# Altium PCB NewXTX_2CPU.PcbDoc (part 1 of 2)
Units mm, origin at the board's own origin, x right, y up, seen from the top; angles counter-clockwise.
Board outline 290 x 98 mm, 2 copper layers (Top Layer, Bottom Layer); 222 components, 212 nets, 1642 pads, 0 vias.
Unrouted connection lines stored in the file: 376.
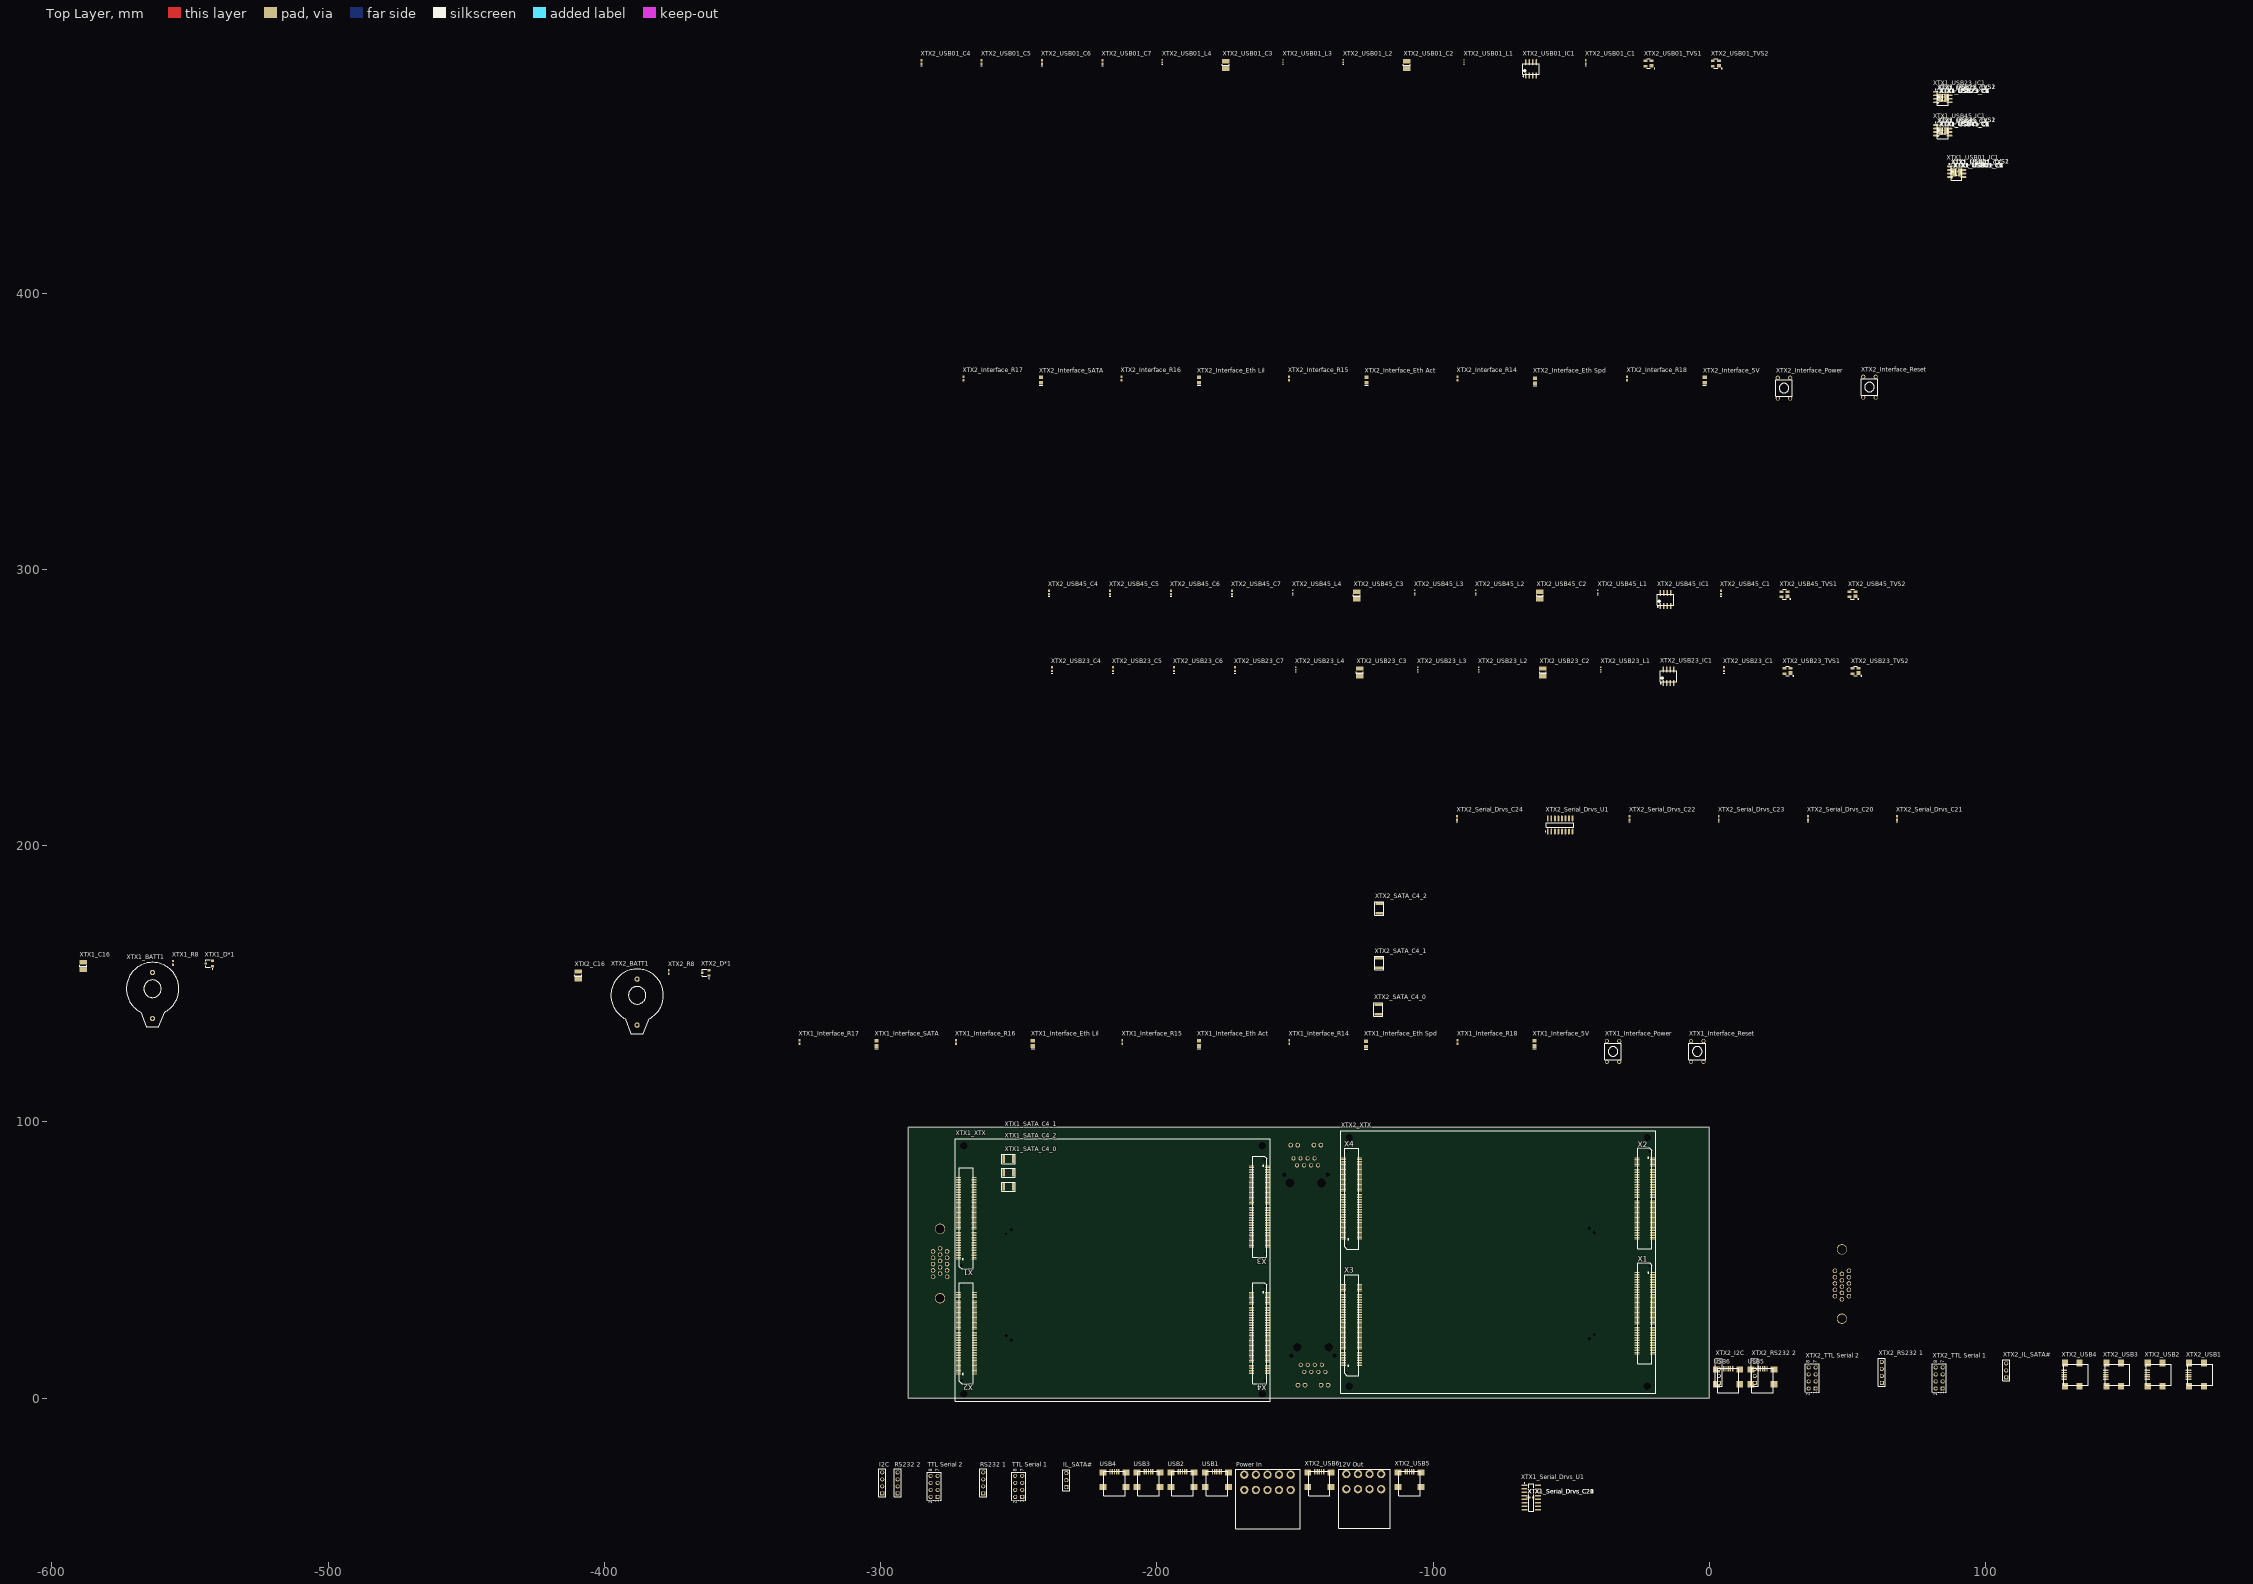
[diagram p0: Top Layer view]
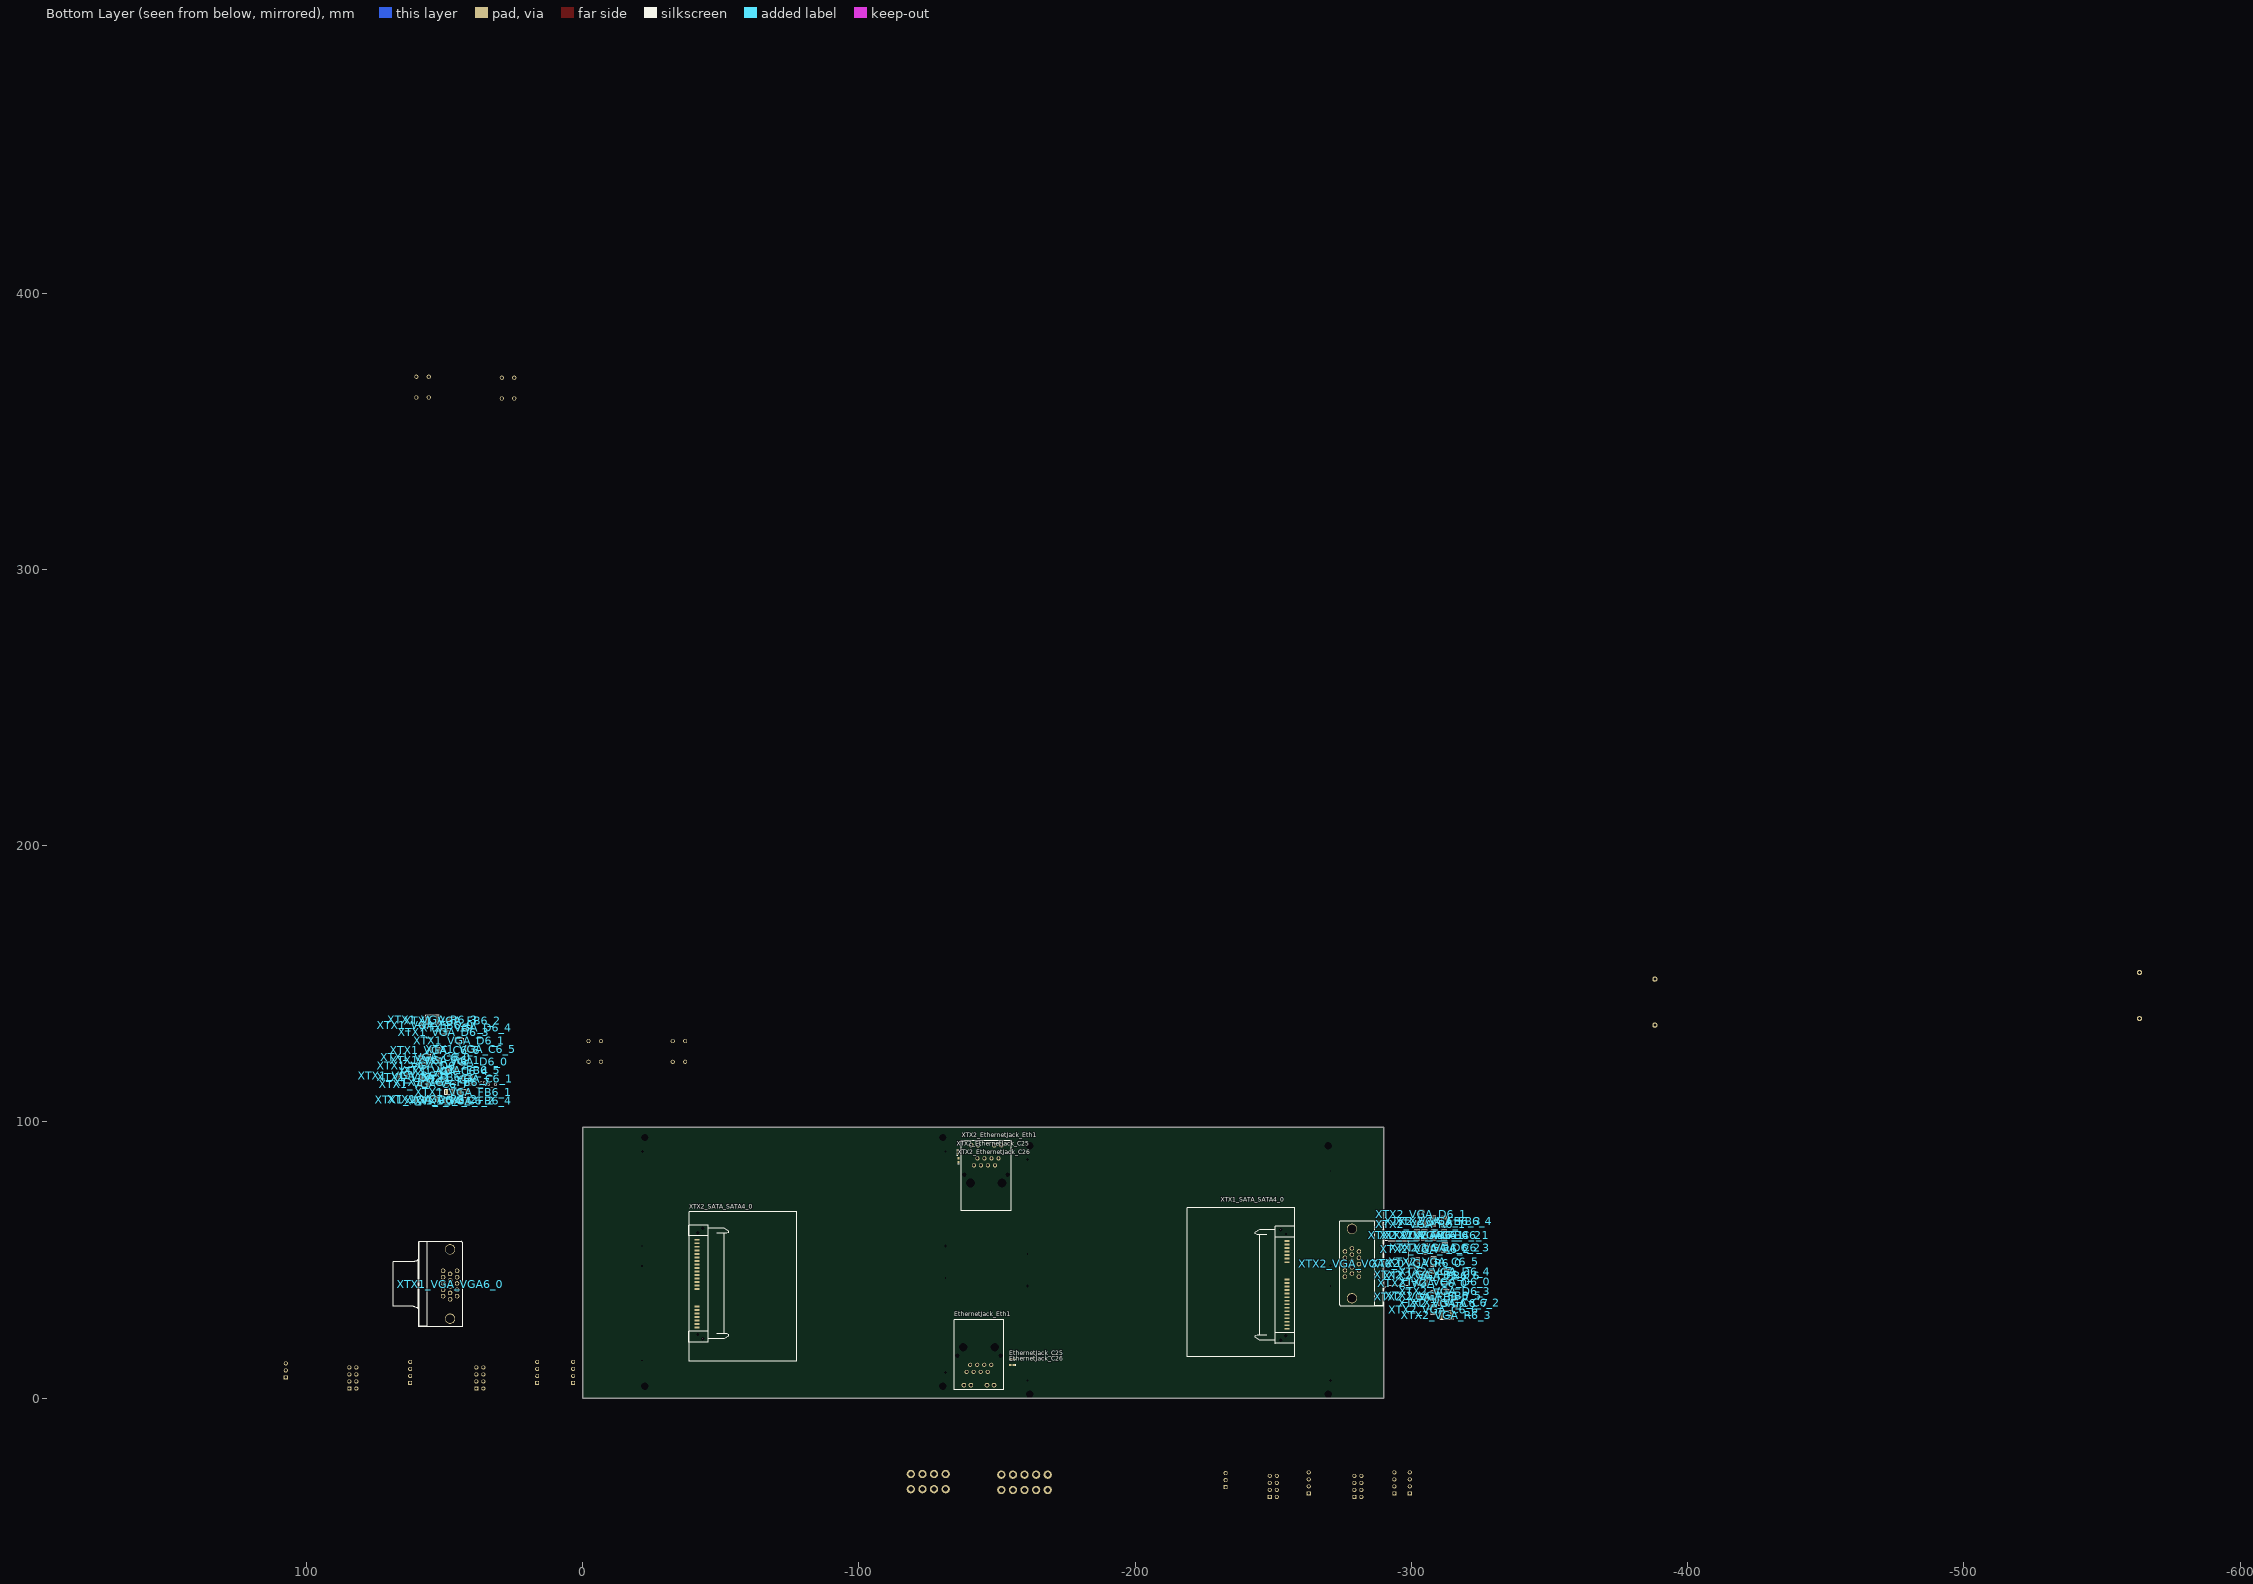
[diagram p1: Bottom Layer view, seen from below]

## Layer stack, top to bottom
Top Layer: signal copper 0.0356
Dielectric: dielectric 0.32, FR-4, Dk 4.8
Bottom Layer: signal copper 0.0356

## Board outline
0,0 0,98 -290,98 -290,0

## Design rules (kind name [scope] priority, off if disabled: settings)
Clearance [All] p1: gap=0.254
DiffPairsRouting "Schematic Differential Pairs Routing_29" [InNet('XTX2_USB5.D_P')] p1: maxlimit=2.54 minlimit=0.305 mostfreqgap=0.305 maxuncoupledlength=12.7
DiffPairsRouting "Schematic Differential Pairs Routing_27" [InNet('XTX2_USB5.D_N')] p2: maxlimit=2.54 minlimit=0.305 mostfreqgap=0.305 maxuncoupledlength=12.7
DiffPairsRouting "Schematic Differential Pairs Routing_25" [InNet('XTX2_USB4.D_P')] p3: maxlimit=2.54 minlimit=0.305 mostfreqgap=0.305 maxuncoupledlength=12.7
DiffPairsRouting "Schematic Differential Pairs Routing_31" [InNet('XTX2_USB4.D_N')] p4: maxlimit=2.54 minlimit=0.305 mostfreqgap=0.305 maxuncoupledlength=12.7
DiffPairsRouting "Schematic Differential Pairs Routing_24" [InNet('XTX2_USB3.D_P')] p5: maxlimit=2.54 minlimit=0.305 mostfreqgap=0.305 maxuncoupledlength=12.7
DiffPairsRouting "Schematic Differential Pairs Routing_30" [InNet('XTX2_USB3.D_N')] p6: maxlimit=2.54 minlimit=0.305 mostfreqgap=0.305 maxuncoupledlength=12.7
DiffPairsRouting "Schematic Differential Pairs Routing_28" [InNet('XTX2_USB2.D_P')] p7: maxlimit=2.54 minlimit=0.305 mostfreqgap=0.305 maxuncoupledlength=12.7
DiffPairsRouting "Schematic Differential Pairs Routing_26" [InNet('XTX2_USB2.D_N')] p8: maxlimit=2.54 minlimit=0.305 mostfreqgap=0.305 maxuncoupledlength=12.7
DiffPairsRouting "Schematic Differential Pairs Routing_17" [InNet('XTX2_USB1.D_P')] p9: maxlimit=2.54 minlimit=0.305 mostfreqgap=0.305 maxuncoupledlength=12.7
DiffPairsRouting "Schematic Differential Pairs Routing_23" [InNet('XTX2_USB1.D_N')] p10: maxlimit=2.54 minlimit=0.305 mostfreqgap=0.305 maxuncoupledlength=12.7
DiffPairsRouting "Schematic Differential Pairs Routing_21" [InNet('XTX2_USB0.D_P')] p11: maxlimit=2.54 minlimit=0.305 mostfreqgap=0.305 maxuncoupledlength=12.7
DiffPairsRouting "Schematic Differential Pairs Routing_20" [InNet('XTX2_USB0.D_N')] p12: maxlimit=2.54 minlimit=0.305 mostfreqgap=0.305 maxuncoupledlength=12.7
DiffPairsRouting "Schematic Differential Pairs Routing_19" [InNet('XTX1_USB5.D_P')] p13: maxlimit=2.54 minlimit=0.305 mostfreqgap=0.305 maxuncoupledlength=12.7
DiffPairsRouting "Schematic Differential Pairs Routing_18" [InNet('XTX1_USB5.D_N')] p14: maxlimit=2.54 minlimit=0.305 mostfreqgap=0.305 maxuncoupledlength=12.7
DiffPairsRouting "Schematic Differential Pairs Routing_11" [InNet('XTX1_USB4.D_P')] p15: maxlimit=2.54 minlimit=0.305 mostfreqgap=0.305 maxuncoupledlength=12.7
DiffPairsRouting "Schematic Differential Pairs Routing_22" [InNet('XTX1_USB4.D_N')] p16: maxlimit=2.54 minlimit=0.305 mostfreqgap=0.305 maxuncoupledlength=12.7
DiffPairsRouting "Schematic Differential Pairs Routing_9" [InNet('XTX1_USB3.D_P')] p17: maxlimit=2.54 minlimit=0.305 mostfreqgap=0.305 maxuncoupledlength=12.7
DiffPairsRouting "Schematic Differential Pairs Routing_16" [InNet('XTX1_USB3.D_N')] p18: maxlimit=2.54 minlimit=0.305 mostfreqgap=0.305 maxuncoupledlength=12.7
DiffPairsRouting "Schematic Differential Pairs Routing_15" [InNet('XTX1_USB2.D_P')] p19: maxlimit=2.54 minlimit=0.305 mostfreqgap=0.305 maxuncoupledlength=12.7
DiffPairsRouting "Schematic Differential Pairs Routing_14" [InNet('XTX1_USB2.D_N')] p20: maxlimit=2.54 minlimit=0.305 mostfreqgap=0.305 maxuncoupledlength=12.7
DiffPairsRouting "Schematic Differential Pairs Routing_8" [InNet('XTX1_USB1.D_P')] p21: maxlimit=2.54 minlimit=0.305 mostfreqgap=0.305 maxuncoupledlength=12.7
DiffPairsRouting "Schematic Differential Pairs Routing_10" [InNet('XTX1_USB1.D_N')] p22: maxlimit=2.54 minlimit=0.305 mostfreqgap=0.305 maxuncoupledlength=12.7
DiffPairsRouting "Schematic Differential Pairs Routing_13" [InNet('XTX1_USB0.D_P')] p23: maxlimit=2.54 minlimit=0.305 mostfreqgap=0.305 maxuncoupledlength=12.7
DiffPairsRouting "Schematic Differential Pairs Routing_12" [InNet('XTX1_USB0.D_N')] p24: maxlimit=2.54 minlimit=0.305 mostfreqgap=0.305 maxuncoupledlength=12.7
DiffPairsRouting "Schematic Differential Pairs Routing" [InNet('XTX1_SATA0_RX_N')] p25: maxlimit=0.178 minlimit=0.178 mostfreqgap=0.178 maxuncoupledlength=12.7
DiffPairsRouting "Schematic Differential Pairs Routing_4" [InNet('XTX2_SATA0_RX_N')] p26: maxlimit=0.178 minlimit=0.178 mostfreqgap=0.178 maxuncoupledlength=12.7
DiffPairsRouting "Schematic Differential Pairs Routing_1" [InNet('XTX1_SATA0_RX_P')] p27: maxlimit=0.178 minlimit=0.178 mostfreqgap=0.178 maxuncoupledlength=12.7
DiffPairsRouting "Schematic Differential Pairs Routing_5" [InNet('XTX2_SATA0_RX_P')] p28: maxlimit=0.178 minlimit=0.178 mostfreqgap=0.178 maxuncoupledlength=12.7
DiffPairsRouting "Schematic Differential Pairs Routing_2" [InNet('XTX1_SATA0_TX_N')] p29: maxlimit=0.178 minlimit=0.178 mostfreqgap=0.178 maxuncoupledlength=12.7
DiffPairsRouting "Schematic Differential Pairs Routing_6" [InNet('XTX2_SATA0_TX_N')] p30: maxlimit=0.178 minlimit=0.178 mostfreqgap=0.178 maxuncoupledlength=12.7
DiffPairsRouting "Schematic Differential Pairs Routing_3" [InNet('XTX1_SATA0_TX_P')] p31: maxlimit=0.178 minlimit=0.178 mostfreqgap=0.178 maxuncoupledlength=12.7
DiffPairsRouting "Schematic Differential Pairs Routing_7" [InNet('XTX2_SATA0_TX_P')] p32: maxlimit=0.178 minlimit=0.178 mostfreqgap=0.178 maxuncoupledlength=12.7
DiffPairsRouting [All] p33: maxlimit=0.254 minlimit=0.254 mostfreqgap=0.254 maxuncoupledlength=12.7
Length "Schematic Length Constraint" [InNet('XTX1_SATA0_RX_N')] p1: maxlimit=114.3 minlimit=0
Length "Schematic Length Constraint_4" [InNet('XTX2_SATA0_RX_N')] p2: maxlimit=114.3 minlimit=0
Length "Schematic Length Constraint_1" [InNet('XTX1_SATA0_RX_P')] p3: maxlimit=114.3 minlimit=0
Length "Schematic Length Constraint_5" [InNet('XTX2_SATA0_RX_P')] p4: maxlimit=114.3 minlimit=0
Length "Schematic Length Constraint_2" [InNet('XTX1_SATA0_TX_N')] p5: maxlimit=114.3 minlimit=0
Length "Schematic Length Constraint_6" [InNet('XTX2_SATA0_TX_N')] p6: maxlimit=114.3 minlimit=0
Length "Schematic Length Constraint_3" [InNet('XTX1_SATA0_TX_P')] p7: maxlimit=114.3 minlimit=0
Length "Schematic Length Constraint_7" [InNet('XTX2_SATA0_TX_P')] p8: maxlimit=114.3 minlimit=0
MatchedLengths "Schematic Matched Net Lengths_28" [InNet('XTX2_USB5.D_P')] p1: tolerance=2.54 checknetsindiffpair=TRUE checkdiffpairvsdiffpair=FALSE checkothers=FALSE
MatchedLengths "Schematic Matched Net Lengths_26" [InNet('XTX2_USB5.D_N')] p2: tolerance=2.54 checknetsindiffpair=TRUE checkdiffpairvsdiffpair=FALSE checkothers=FALSE
MatchedLengths "Schematic Matched Net Lengths_31" [InNet('XTX2_USB4.D_P')] p3: tolerance=2.54 checknetsindiffpair=TRUE checkdiffpairvsdiffpair=FALSE checkothers=FALSE
MatchedLengths "Schematic Matched Net Lengths_30" [InNet('XTX2_USB4.D_N')] p4: tolerance=2.54 checknetsindiffpair=TRUE checkdiffpairvsdiffpair=FALSE checkothers=FALSE
MatchedLengths "Schematic Matched Net Lengths_24" [InNet('XTX2_USB3.D_P')] p5: tolerance=2.54 checknetsindiffpair=TRUE checkdiffpairvsdiffpair=FALSE checkothers=FALSE
MatchedLengths "Schematic Matched Net Lengths_29" [InNet('XTX2_USB3.D_N')] p6: tolerance=2.54 checknetsindiffpair=TRUE checkdiffpairvsdiffpair=FALSE checkothers=FALSE
MatchedLengths "Schematic Matched Net Lengths_27" [InNet('XTX2_USB2.D_P')] p7: tolerance=2.54 checknetsindiffpair=TRUE checkdiffpairvsdiffpair=FALSE checkothers=FALSE
MatchedLengths "Schematic Matched Net Lengths_25" [InNet('XTX2_USB2.D_N')] p8: tolerance=2.54 checknetsindiffpair=TRUE checkdiffpairvsdiffpair=FALSE checkothers=FALSE
MatchedLengths "Schematic Matched Net Lengths_23" [InNet('XTX2_USB1.D_P')] p9: tolerance=2.54 checknetsindiffpair=TRUE checkdiffpairvsdiffpair=FALSE checkothers=FALSE
MatchedLengths "Schematic Matched Net Lengths_22" [InNet('XTX2_USB1.D_N')] p10: tolerance=2.54 checknetsindiffpair=TRUE checkdiffpairvsdiffpair=FALSE checkothers=FALSE
MatchedLengths "Schematic Matched Net Lengths_20" [InNet('XTX2_USB0.D_P')] p11: tolerance=2.54 checknetsindiffpair=TRUE checkdiffpairvsdiffpair=FALSE checkothers=FALSE
MatchedLengths "Schematic Matched Net Lengths_19" [InNet('XTX2_USB0.D_N')] p12: tolerance=2.54 checknetsindiffpair=TRUE checkdiffpairvsdiffpair=FALSE checkothers=FALSE
MatchedLengths "Schematic Matched Net Lengths_18" [InNet('XTX1_USB5.D_P')] p13: tolerance=2.54 checknetsindiffpair=TRUE checkdiffpairvsdiffpair=FALSE checkothers=FALSE
MatchedLengths "Schematic Matched Net Lengths_17" [InNet('XTX1_USB5.D_N')] p14: tolerance=2.54 checknetsindiffpair=TRUE checkdiffpairvsdiffpair=FALSE checkothers=FALSE
MatchedLengths "Schematic Matched Net Lengths_16" [InNet('XTX1_USB4.D_P')] p15: tolerance=2.54 checknetsindiffpair=TRUE checkdiffpairvsdiffpair=FALSE checkothers=FALSE
MatchedLengths "Schematic Matched Net Lengths_21" [InNet('XTX1_USB4.D_N')] p16: tolerance=2.54 checknetsindiffpair=TRUE checkdiffpairvsdiffpair=FALSE checkothers=FALSE
MatchedLengths "Schematic Matched Net Lengths_10" [InNet('XTX1_USB3.D_P')] p17: tolerance=2.54 checknetsindiffpair=TRUE checkdiffpairvsdiffpair=FALSE checkothers=FALSE
MatchedLengths "Schematic Matched Net Lengths_15" [InNet('XTX1_USB3.D_N')] p18: tolerance=2.54 checknetsindiffpair=TRUE checkdiffpairvsdiffpair=FALSE checkothers=FALSE
MatchedLengths "Schematic Matched Net Lengths_14" [InNet('XTX1_USB2.D_P')] p19: tolerance=2.54 checknetsindiffpair=TRUE checkdiffpairvsdiffpair=FALSE checkothers=FALSE
MatchedLengths "Schematic Matched Net Lengths_13" [InNet('XTX1_USB2.D_N')] p20: tolerance=2.54 checknetsindiffpair=TRUE checkdiffpairvsdiffpair=FALSE checkothers=FALSE
MatchedLengths "Schematic Matched Net Lengths_8" [InNet('XTX1_USB1.D_P')] p21: tolerance=2.54 checknetsindiffpair=TRUE checkdiffpairvsdiffpair=FALSE checkothers=FALSE
MatchedLengths "Schematic Matched Net Lengths_9" [InNet('XTX1_USB1.D_N')] p22: tolerance=2.54 checknetsindiffpair=TRUE checkdiffpairvsdiffpair=FALSE checkothers=FALSE
MatchedLengths "Schematic Matched Net Lengths_12" [InNet('XTX1_USB0.D_P')] p23: tolerance=2.54 checknetsindiffpair=TRUE checkdiffpairvsdiffpair=FALSE checkothers=FALSE
MatchedLengths "Schematic Matched Net Lengths_11" [InNet('XTX1_USB0.D_N')] p24: tolerance=2.54 checknetsindiffpair=TRUE checkdiffpairvsdiffpair=FALSE checkothers=FALSE
MatchedLengths "Schematic Matched Net Lengths" [InNet('XTX1_SATA0_RX_N')] p25: tolerance=0.127 checknetsindiffpair=TRUE checkdiffpairvsdiffpair=FALSE checkothers=FALSE
MatchedLengths "Schematic Matched Net Lengths_4" [InNet('XTX2_SATA0_RX_N')] p26: tolerance=0.127 checknetsindiffpair=TRUE checkdiffpairvsdiffpair=FALSE checkothers=FALSE
MatchedLengths "Schematic Matched Net Lengths_1" [InNet('XTX1_SATA0_RX_P')] p27: tolerance=0.127 checknetsindiffpair=TRUE checkdiffpairvsdiffpair=FALSE checkothers=FALSE
MatchedLengths "Schematic Matched Net Lengths_5" [InNet('XTX2_SATA0_RX_P')] p28: tolerance=0.127 checknetsindiffpair=TRUE checkdiffpairvsdiffpair=FALSE checkothers=FALSE
MatchedLengths "Schematic Matched Net Lengths_2" [InNet('XTX1_SATA0_TX_N')] p29: tolerance=0.127 checknetsindiffpair=TRUE checkdiffpairvsdiffpair=FALSE checkothers=FALSE
MatchedLengths "Schematic Matched Net Lengths_6" [InNet('XTX2_SATA0_TX_N')] p30: tolerance=0.127 checknetsindiffpair=TRUE checkdiffpairvsdiffpair=FALSE checkothers=FALSE
MatchedLengths "Schematic Matched Net Lengths_3" [InNet('XTX1_SATA0_TX_P')] p31: tolerance=0.127 checknetsindiffpair=TRUE checkdiffpairvsdiffpair=FALSE checkothers=FALSE
MatchedLengths "Schematic Matched Net Lengths_7" [InNet('XTX2_SATA0_TX_P')] p32: tolerance=0.127 checknetsindiffpair=TRUE checkdiffpairvsdiffpair=FALSE checkothers=FALSE
PolygonConnect [All] p1: connectstyle=Relief reliefconductorwidth=0.254 reliefentries=4 polygonreliefangle="90 Angle"
RoomDefinition XTX2_USB45 [InComponentClass('XTX2_USB45')] p1: confinementstyle=ConfineIn formatcopy=TRUE lockcomponents=FALSE outline -444.5,-129.54 -393.7,-129.54 -393.7,-104.14 -444.5,-104.14
RoomDefinition XTX2_USB23 [InComponentClass('XTX2_USB23')] p2: confinementstyle=ConfineIn formatcopy=TRUE lockcomponents=FALSE outline -444.5,-129.54 -393.7,-129.54 -393.7,-104.14 -444.5,-104.14
RoomDefinition XTX2_USB01 [InComponentClass('XTX2_USB01')] p3: confinementstyle=ConfineIn formatcopy=TRUE lockcomponents=FALSE outline -444.5,-129.54 -393.7,-129.54 -393.7,-104.14 -444.5,-104.14
RoomDefinition XTX2_Serial_Drvs [InComponentClass('XTX2_Serial_Drvs')] p4: confinementstyle=ConfineIn formatcopy=TRUE lockcomponents=FALSE outline -444.5,-129.54 -393.7,-129.54 -393.7,-104.14 -444.5,-104.14
RoomDefinition XTX2_SATA [InComponentClass('XTX2_SATA')] p5: confinementstyle=ConfineIn formatcopy=TRUE lockcomponents=FALSE outline -444.5,-129.54 -393.7,-129.54 -393.7,-104.14 -444.5,-104.14
RoomDefinition XTX2_EthernetJack [InComponentClass('XTX2_EthernetJack')] p6: confinementstyle=ConfineIn formatcopy=TRUE lockcomponents=FALSE outline -444.5,-129.54 -393.7,-129.54 -393.7,-104.14 -444.5,-104.14
RoomDefinition XTX1_USB45 [InComponentClass('XTX1_USB45')] p7: confinementstyle=ConfineIn formatcopy=TRUE lockcomponents=FALSE outline -444.5,-129.54 -393.7,-129.54 -393.7,-104.14 -444.5,-104.14
RoomDefinition XTX1_USB23 [InComponentClass('XTX1_USB23')] p8: confinementstyle=ConfineIn formatcopy=TRUE lockcomponents=FALSE outline -444.5,-129.54 -393.7,-129.54 -393.7,-104.14 -444.5,-104.14
RoomDefinition XTX1_USB01 [InComponentClass('XTX1_USB01')] p9: confinementstyle=ConfineIn formatcopy=TRUE lockcomponents=FALSE outline -444.5,-129.54 -393.7,-129.54 -393.7,-104.14 -444.5,-104.14
RoomDefinition XTX1_Serial_Drvs [InComponentClass('XTX1_Serial_Drvs')] p10: confinementstyle=ConfineIn formatcopy=TRUE lockcomponents=FALSE outline -444.5,-129.54 -393.7,-129.54 -393.7,-104.14 -444.5,-104.14
RoomDefinition XTX1_SATA [InComponentClass('XTX1_SATA')] p11: confinementstyle=ConfineIn formatcopy=TRUE lockcomponents=FALSE outline -444.5,-129.54 -393.7,-129.54 -393.7,-104.14 -444.5,-104.14
RoomDefinition EthernetJack [InComponentClass('EthernetJack')] p12: confinementstyle=ConfineIn formatcopy=TRUE lockcomponents=FALSE outline -444.5,-129.54 -393.7,-129.54 -393.7,-104.14 -444.5,-104.14
RoomDefinition XTX2_VGA [InComponentClass('XTX2_VGA')] p13: confinementstyle=ConfineIn formatcopy=TRUE lockcomponents=FALSE outline -320,27 -271,27 -271,70 -320,70
RoomDefinition XTX1_VGA [InComponentClass('XTX1_VGA')] p14: confinementstyle=ConfineIn formatcopy=TRUE lockcomponents=FALSE outline 32.5,16 79,16 79,65 32.5,65
RoomDefinition XTX1_Interface [InComponentClass('XTX1_Interface')] p15: confinementstyle=ConfineIn formatcopy=TRUE lockcomponents=FALSE outline -329.977,120.658 21.686,120.658 21.686,133.104 -329.977,133.104
RoomDefinition XTX1 [InComponentClass('XTX1')] p16: confinementstyle=ConfineIn formatcopy=TRUE lockcomponents=FALSE outline -297,-6 10,-6 10,114 -297,114
RoomDefinition XTX2_Interface [InComponentClass('XTX2_Interface')] p17: confinementstyle=ConfineIn formatcopy=TRUE lockcomponents=FALSE outline -270.637,360.807 84.074,360.807 84.074,373.253 -270.637,373.253
RoomDefinition XTX2 [InComponentClass('XTX2')] p18: confinementstyle=ConfineIn formatcopy=TRUE lockcomponents=FALSE outline -297,-7 10,-7 10,114 -297,114
RoomDefinition XTXBoard2 [InComponentClass('XTXBoard2')] p19: confinementstyle=ConfineIn formatcopy=TRUE lockcomponents=FALSE outline -300.924,-47.606 -102.804,-47.606 -102.804,-22.841 -300.924,-22.841
RoutingVias [All] p1: holewidth=0.711 width=1.27 viastyle="Through Hole" minholewidth=0.711 minwidth=1.27 maxholewidth=0.711 maxwidth=1.27
SilkscreenOverComponentPads [All] p1: minsilkscreentomaskgap=0.254
SolderMaskExpansion [All] p1: expansion=0.102
TestPointUsage [All] p1: valid=0 allowmultiple=FALSE
Testpoint [All] p1: side=15 testpointundercomponent=TRUE minsize=1.016 maxsize=2.54 preferedsize=1.524 minholesize=0 maxholesize=1.016 preferedholesize=0.813 testpointgrid=0.025 style=1023 order=0123456789
Width "Schematic Width Constraint_28" [InNet('XTX2_USB5.D_P')] p1: maxlimit=0.152 minlimit=0.152 preferedwidth=0.152
Width "Schematic Width Constraint_26" [InNet('XTX2_USB5.D_N')] p2: maxlimit=0.152 minlimit=0.152 preferedwidth=0.152
Width "Schematic Width Constraint_31" [InNet('XTX2_USB4.D_P')] p3: maxlimit=0.152 minlimit=0.152 preferedwidth=0.152
Width "Schematic Width Constraint_30" [InNet('XTX2_USB4.D_N')] p4: maxlimit=0.152 minlimit=0.152 preferedwidth=0.152
Width "Schematic Width Constraint_24" [InNet('XTX2_USB3.D_P')] p5: maxlimit=0.152 minlimit=0.152 preferedwidth=0.152
Width "Schematic Width Constraint_29" [InNet('XTX2_USB3.D_N')] p6: maxlimit=0.152 minlimit=0.152 preferedwidth=0.152
Width "Schematic Width Constraint_27" [InNet('XTX2_USB2.D_P')] p7: maxlimit=0.152 minlimit=0.152 preferedwidth=0.152
Width "Schematic Width Constraint_25" [InNet('XTX2_USB2.D_N')] p8: maxlimit=0.152 minlimit=0.152 preferedwidth=0.152
Width "Schematic Width Constraint_23" [InNet('XTX2_USB1.D_P')] p9: maxlimit=0.152 minlimit=0.152 preferedwidth=0.152
Width "Schematic Width Constraint_22" [InNet('XTX2_USB1.D_N')] p10: maxlimit=0.152 minlimit=0.152 preferedwidth=0.152
Width "Schematic Width Constraint_20" [InNet('XTX2_USB0.D_P')] p11: maxlimit=0.152 minlimit=0.152 preferedwidth=0.152
Width "Schematic Width Constraint_19" [InNet('XTX2_USB0.D_N')] p12: maxlimit=0.152 minlimit=0.152 preferedwidth=0.152
Width "Schematic Width Constraint_10" [InNet('XTX1_USB5.D_P')] p13: maxlimit=0.152 minlimit=0.152 preferedwidth=0.152
Width "Schematic Width Constraint_9" [InNet('XTX1_USB5.D_N')] p14: maxlimit=0.152 minlimit=0.152 preferedwidth=0.152
Width "Schematic Width Constraint_8" [InNet('XTX1_USB4.D_P')] p15: maxlimit=0.152 minlimit=0.152 preferedwidth=0.152
Width "Schematic Width Constraint_21" [InNet('XTX1_USB4.D_N')] p16: maxlimit=0.152 minlimit=0.152 preferedwidth=0.152
Width "Schematic Width Constraint_2" [InNet('XTX1_USB3.D_P')] p17: maxlimit=0.152 minlimit=0.152 preferedwidth=0.152
Width "Schematic Width Constraint_7" [InNet('XTX1_USB3.D_N')] p18: maxlimit=0.152 minlimit=0.152 preferedwidth=0.152
Width "Schematic Width Constraint_6" [InNet('XTX1_USB2.D_P')] p19: maxlimit=0.152 minlimit=0.152 preferedwidth=0.152
Width "Schematic Width Constraint_5" [InNet('XTX1_USB2.D_N')] p20: maxlimit=0.152 minlimit=0.152 preferedwidth=0.152
Width "Schematic Width Constraint" [InNet('XTX1_USB1.D_P')] p21: maxlimit=0.152 minlimit=0.152 preferedwidth=0.152
Width "Schematic Width Constraint_1" [InNet('XTX1_USB1.D_N')] p22: maxlimit=0.152 minlimit=0.152 preferedwidth=0.152
Width "Schematic Width Constraint_4" [InNet('XTX1_USB0.D_P')] p23: maxlimit=0.152 minlimit=0.152 preferedwidth=0.152
Width "Schematic Width Constraint_3" [InNet('XTX1_USB0.D_N')] p24: maxlimit=0.152 minlimit=0.152 preferedwidth=0.152
Width "Schematic Width Constraint_11" [InNet('XTX1_SATA0_RX_N')] p25: maxlimit=0.152 minlimit=0.152 preferedwidth=0.152
Width "Schematic Width Constraint_15" [InNet('XTX2_SATA0_RX_N')] p26: maxlimit=0.152 minlimit=0.152 preferedwidth=0.152
Width "Schematic Width Constraint_12" [InNet('XTX1_SATA0_RX_P')] p27: maxlimit=0.152 minlimit=0.152 preferedwidth=0.152
Width "Schematic Width Constraint_16" [InNet('XTX2_SATA0_RX_P')] p28: maxlimit=0.152 minlimit=0.152 preferedwidth=0.152
Width "Schematic Width Constraint_13" [InNet('XTX1_SATA0_TX_N')] p29: maxlimit=0.152 minlimit=0.152 preferedwidth=0.152
Width "Schematic Width Constraint_17" [InNet('XTX2_SATA0_TX_N')] p30: maxlimit=0.152 minlimit=0.152 preferedwidth=0.152
Width "Schematic Width Constraint_14" [InNet('XTX1_SATA0_TX_P')] p31: maxlimit=0.152 minlimit=0.152 preferedwidth=0.152
Width "Schematic Width Constraint_18" [InNet('XTX2_SATA0_TX_P')] p32: maxlimit=0.152 minlimit=0.152 preferedwidth=0.152
Width "Schematic Width Constraint_33" [InNet('12VCC')] p33: maxlimit=2.54 minlimit=0.635 preferedwidth=0.635
Width "Schematic Width Constraint_32" [InNet('12VCC')] p34: maxlimit=2.54 minlimit=0.635 preferedwidth=0.635
Width [All] p35: maxlimit=0.254 minlimit=0.254 preferedwidth=0.254
22 further rules are at their usual default settings.

## Classes and differential pairs
channel class XTX: XTX1 XTX2
channel class VGA: XTX1_VGA XTX2_VGA
channel class USB: XTX1_USB01 XTX1_USB23 XTX1_USB45 XTX2_USB01 XTX2_USB23 XTX2_USB45
channel class SerialLvlConvert: XTX1_Serial_Drvs XTX2_Serial_Drvs
channel class SATA: XTX1_SATA XTX2_SATA
channel class LEDSandButtons: XTX1_Interface XTX2_Interface
channel class EthernetMagJack: EthernetJack XTX2_EthernetJack
component class XTXBoard2: "12V Out" I2C IL_SATA# "Power In" "RS232 1" "RS232 2" "TTL Serial 1" "TTL Serial 2" USB1 USB2 USB3 USB4 USB5 USB6 XTX2_I2C XTX2_IL_SATA# "XTX2_RS232 1" "XTX2_RS232 2" "XTX2_TTL Serial 1" "XTX2_TTL Serial 2" XTX2_USB1 XTX2_USB2 XTX2_USB3 XTX2_USB4 XTX2_USB5 XTX2_USB6
component class XTX2: XTX2_BATT1 XTX2_C16 XTX2_D*1 XTX2_R8 XTX2_XTX
component class XTX2_Interface: XTX2_Interface_5V "XTX2_Interface_Eth Act" "XTX2_Interface_Eth Lil" "XTX2_Interface_Eth Spd" XTX2_Interface_Power XTX2_Interface_R14 XTX2_Interface_R15 XTX2_Interface_R16 XTX2_Interface_R17 XTX2_Interface_R18 XTX2_Interface_Reset XTX2_Interface_SATA
component class XTX1: XTX1_BATT1 XTX1_C16 XTX1_D*1 XTX1_R8 XTX1_XTX
component class XTX1_Interface: XTX1_Interface_5V "XTX1_Interface_Eth Act" "XTX1_Interface_Eth Lil" "XTX1_Interface_Eth Spd" XTX1_Interface_Power XTX1_Interface_R14 XTX1_Interface_R15 XTX1_Interface_R16 XTX1_Interface_R17 XTX1_Interface_R18 XTX1_Interface_Reset XTX1_Interface_SATA
component class XTX2_VGA: XTX2_VGA_C6_0 XTX2_VGA_C6_1 XTX2_VGA_C6_2 XTX2_VGA_C6_3 XTX2_VGA_C6_4 XTX2_VGA_C6_5 XTX2_VGA_C6_6 XTX2_VGA_C6_7 XTX2_VGA_D6_0 XTX2_VGA_D6_1 XTX2_VGA_D6_2 XTX2_VGA_D6_3 XTX2_VGA_D6_4 XTX2_VGA_FB6_0 XTX2_VGA_FB6_1 XTX2_VGA_FB6_2 XTX2_VGA_FB6_3 XTX2_VGA_FB6_4 XTX2_VGA_FB6_5 XTX2_VGA_FB6_6 XTX2_VGA_FB6_7 XTX2_VGA_R6_0 XTX2_VGA_R6_1 XTX2_VGA_R6_2 XTX2_VGA_R6_3 XTX2_VGA_VGA6_0
component class XTX2_EthernetJack: XTX2_EthernetJack_C25 XTX2_EthernetJack_C26 XTX2_EthernetJack_Eth1
component class EthernetJack: EthernetJack_C25 EthernetJack_C26 EthernetJack_Eth1
component class XTX2_SATA: XTX2_SATA_C4_0 XTX2_SATA_C4_1 XTX2_SATA_C4_2 XTX2_SATA_SATA4_0
component class XTX1_SATA: XTX1_SATA_C4_0 XTX1_SATA_C4_1 XTX1_SATA_C4_2 XTX1_SATA_SATA4_0
component class XTX2_Serial_Drvs: XTX2_Serial_Drvs_C20 XTX2_Serial_Drvs_C21 XTX2_Serial_Drvs_C22 XTX2_Serial_Drvs_C23 XTX2_Serial_Drvs_C24 XTX2_Serial_Drvs_U1
component class XTX1_Serial_Drvs: XTX1_Serial_Drvs_C20 XTX1_Serial_Drvs_C21 XTX1_Serial_Drvs_C22 XTX1_Serial_Drvs_C23 XTX1_Serial_Drvs_C24 XTX1_Serial_Drvs_U1
component class XTX2_USB01: XTX2_USB01_C1 XTX2_USB01_C2 XTX2_USB01_C3 XTX2_USB01_C4 XTX2_USB01_C5 XTX2_USB01_C6 XTX2_USB01_C7 XTX2_USB01_IC1 XTX2_USB01_L1 XTX2_USB01_L2 XTX2_USB01_L3 XTX2_USB01_L4 XTX2_USB01_TVS1 XTX2_USB01_TVS2
component class XTX1_USB01: XTX1_USB01_C1 XTX1_USB01_C2 XTX1_USB01_C3 XTX1_USB01_C4 XTX1_USB01_C5 XTX1_USB01_C6 XTX1_USB01_C7 XTX1_USB01_IC1 XTX1_USB01_L1 XTX1_USB01_L2 XTX1_USB01_L3 XTX1_USB01_L4 XTX1_USB01_TVS1 XTX1_USB01_TVS2
component class XTX2_USB23: XTX2_USB23_C1 XTX2_USB23_C2 XTX2_USB23_C3 XTX2_USB23_C4 XTX2_USB23_C5 XTX2_USB23_C6 XTX2_USB23_C7 XTX2_USB23_IC1 XTX2_USB23_L1 XTX2_USB23_L2 XTX2_USB23_L3 XTX2_USB23_L4 XTX2_USB23_TVS1 XTX2_USB23_TVS2
component class XTX1_USB23: XTX1_USB23_C1 XTX1_USB23_C2 XTX1_USB23_C3 XTX1_USB23_C4 XTX1_USB23_C5 XTX1_USB23_C6 XTX1_USB23_C7 XTX1_USB23_IC1 XTX1_USB23_L1 XTX1_USB23_L2 XTX1_USB23_L3 XTX1_USB23_L4 XTX1_USB23_TVS1 XTX1_USB23_TVS2
component class XTX2_USB45: XTX2_USB45_C1 XTX2_USB45_C2 XTX2_USB45_C3 XTX2_USB45_C4 XTX2_USB45_C5 XTX2_USB45_C6 XTX2_USB45_C7 XTX2_USB45_IC1 XTX2_USB45_L1 XTX2_USB45_L2 XTX2_USB45_L3 XTX2_USB45_L4 XTX2_USB45_TVS1 XTX2_USB45_TVS2
component class XTX1_USB45: XTX1_USB45_C1 XTX1_USB45_C2 XTX1_USB45_C3 XTX1_USB45_C4 XTX1_USB45_C5 XTX1_USB45_C6 XTX1_USB45_C7 XTX1_USB45_IC1 XTX1_USB45_L1 XTX1_USB45_L2 XTX1_USB45_L3 XTX1_USB45_L4 XTX1_USB45_TVS1 XTX1_USB45_TVS2
component class XTX1_VGA: XTX1_VGA_C6_0 XTX1_VGA_C6_1 XTX1_VGA_C6_2 XTX1_VGA_C6_3 XTX1_VGA_C6_4 XTX1_VGA_C6_5 XTX1_VGA_C6_6 XTX1_VGA_C6_7 XTX1_VGA_D6_0 XTX1_VGA_D6_1 XTX1_VGA_D6_2 XTX1_VGA_D6_3 XTX1_VGA_D6_4 XTX1_VGA_FB6_0 XTX1_VGA_FB6_1 XTX1_VGA_FB6_2 XTX1_VGA_FB6_3 XTX1_VGA_FB6_4 XTX1_VGA_FB6_5 XTX1_VGA_FB6_6 XTX1_VGA_FB6_7 XTX1_VGA_R6_0 XTX1_VGA_R6_1 XTX1_VGA_R6_2 XTX1_VGA_R6_3 XTX1_VGA_VGA6_0
differential pair XTX2_SATA0_TX: +XTX2_SATA0_TX_P -XTX2_SATA0_TX_N
differential pair XTX2_SATA0_RX: +XTX2_SATA0_RX_P -XTX2_SATA0_RX_N
differential pair XTX2_ETH_TXD: +XTX2_ETH_TXD_P -XTX2_ETH_TXD_N
differential pair XTX2_ETH_RXD: +XTX2_ETH_RXD_P -XTX2_ETH_RXD_N
differential pair XTX1_USB5.D: +XTX1_USB5.D_P -XTX1_USB5.D_N
differential pair XTX1_USB4.D: +XTX1_USB4.D_P -XTX1_USB4.D_N
differential pair XTX1_USB3.D: +XTX1_USB3.D_P -XTX1_USB3.D_N
differential pair XTX1_USB2.D: +XTX1_USB2.D_P -XTX1_USB2.D_N
differential pair XTX1_USB1.D: +XTX1_USB1.D_P -XTX1_USB1.D_N
differential pair XTX1_USB0.D: +XTX1_USB0.D_P -XTX1_USB0.D_N
differential pair XTX1_SATA0_TX: +XTX1_SATA0_TX_P -XTX1_SATA0_TX_N
differential pair XTX1_SATA0_RX: +XTX1_SATA0_RX_P -XTX1_SATA0_RX_N
differential pair XTX1_ETH_TXD: +XTX1_ETH_TXD_P -XTX1_ETH_TXD_N
differential pair XTX1_ETH_RXD: +XTX1_ETH_RXD_P -XTX1_ETH_RXD_N
differential pair XTX2_USB0.D: +XTX2_USB0.D_P -XTX2_USB0.D_N
differential pair XTX2_USB1.D: +XTX2_USB1.D_P -XTX2_USB1.D_N
differential pair XTX2_USB2.D: +XTX2_USB2.D_P -XTX2_USB2.D_N
differential pair XTX2_USB3.D: +XTX2_USB3.D_P -XTX2_USB3.D_N
differential pair XTX2_USB4.D: +XTX2_USB4.D_P -XTX2_USB4.D_N
differential pair XTX2_USB5.D: +XTX2_USB5.D_P -XTX2_USB5.D_N

## Components (designator, comment, footprint, x,y, rotation, side; value= is the part's Value field where it differs from the comment)
"12V Out" "5569 Mini-Fit Jr 8-Pos Right Angle" "8-POS 5569 Mini-Fit Jr 2" -131.379,-33.001 r0 top
EthernetJack_C25 "Cap Semi" 0402 -155.431,14.035 r0 bottom (schematic designator C25)
EthernetJack_C26 "Cap Semi" 0402 -155.431,12.035 r0 bottom (schematic designator C26)
EthernetJack_Eth1 "48025-0002" 48025-0002 -143.431,12.035 r0 bottom (schematic designator Eth1)
I2C "Header 4" HDR1X4 -299.4,-34.525 r90 top
IL_SATA# "Header 3" HDR1X3 -232.725,-32.239 r90 top
"Power In" "5569 Mini-Fit Jr 10-Pos Right Angle" "10-Pos 5569 Mini-Fit Jr 2" -168.336,-33.255 r0 top
"RS232 1" "Header 4" HDR1X4 -262.824,-34.525 r90 top
"RS232 2" "Header 4" HDR1X4 -293.812,-34.525 r90 top
"TTL Serial 1" "Header 4X2" HDR2X4 -248.727,-35.795 r90 top
"TTL Serial 2" "Header 4X2" HDR2X4 -279.334,-35.795 r90 top
USB1 "UX60-MB-5ST" UX60-MB-5ST -178.242,-25.635 r0 top
USB2 "UX60-MB-5ST" UX60-MB-5ST -190.688,-25.635 r0 top
USB3 "UX60-MB-5ST" UX60-MB-5ST -203.007,-25.635 r0 top
USB4 "UX60-MB-5ST" UX60-MB-5ST -215.326,-25.635 r0 top
USB5 "UX60-MB-5ST" UX60-MB-5ST 19.304,11.557 r0 top
USB6 "UX60-MB-5ST" UX60-MB-5ST 6.858,11.557 r0 top
XTX1_BATT1 "BH600" BH600 -563.547,148.178 r0 top (schematic designator BATT1)
XTX1_C16 "Cap Semi" C1210 -588.693,156.433 r90 top (schematic designator C16)
XTX1_D*1 "BAV99" SOT-23 -543.1,157.322 r90 top (schematic designator D*1)
XTX1_Interface_5V "LED2" C0805 -63.277,128.405 r90 top (schematic designator 5V)
"XTX1_Interface_Eth Act" "LED2" C0805 -184.689,128.405 r90 top (schematic designator "Eth Act")
"XTX1_Interface_Eth Lil" "LED2" C0805 -244.887,128.405 r90 top (schematic designator "Eth Lil")
"XTX1_Interface_Eth Spd" "LED2" C0805 -124.237,128.151 r90 top (schematic designator "Eth Spd")
XTX1_Interface_Power "FSM Switch" FSM4JH -34.829,125.484 r90 top (schematic designator Power)
XTX1_Interface_R14 "Res Semi" 1005[0402] -152.05,128.913 r90 top (schematic designator R14)
XTX1_Interface_R15 "Res Semi" 1005[0402] -212.502,128.913 r90 top (schematic designator R15)
XTX1_Interface_R16 "Res Semi" 1005[0402] -272.7,128.913 r90 top (schematic designator R16)
XTX1_Interface_R17 "Res Semi" 1005[0402] -329.342,128.913 r90 top (schematic designator R17)
XTX1_Interface_R18 "Res Semi" 1005[0402] -91.09,128.913 r90 top (schematic designator R18)
XTX1_Interface_Reset "FSM Switch" FSM4JH -4.349,125.484 r90 top (schematic designator Reset)
XTX1_Interface_SATA "LED2" C0805 -301.529,128.405 r90 top (schematic designator SATA)
XTX1_R8 "Res Semi" 1005[0402] -556.181,157.576 r90 top (schematic designator R8)
XTX1_SATA_C4_0 "10uF" "1210 (3225) Capacitor" -253.654,76.552 r180 top (schematic designator C4_0)
XTX1_SATA_C4_1 "10uF" "1210 (3225) Capacitor" -253.654,81.552 r180 top (schematic designator C4_1)
XTX1_SATA_C4_2 "10uF" "1210 (3225) Capacitor" -253.654,86.552 r180 top (schematic designator C4_2)
XTX1_SATA_SATA4_0 "SATA Drive" "SATA HDD" -238.272,68.976 r0 bottom (schematic designator SATA4_0)
XTX1_Serial_Drvs_C20 "Cap Semi" 0402 -64.431,-36.035 r0 top (schematic designator C20)
XTX1_Serial_Drvs_C21 "Cap Semi" 0402 -64.431,-36.035 r0 top (schematic designator C21)
XTX1_Serial_Drvs_C22 "Cap Semi" 0402 -64.431,-36.035 r0 top (schematic designator C22)
XTX1_Serial_Drvs_C23 "Cap Semi" 0402 -64.431,-36.035 r0 top (schematic designator C23)
XTX1_Serial_Drvs_C24 "Cap Semi" 0402 -64.431,-36.035 r0 top (schematic designator C24)
XTX1_Serial_Drvs_U1 "MAX232ACSE" NSO16_N -64.431,-36.035 r0 top (schematic designator U1)
XTX1_USB01_C1 "Cap Semi" 0402 89.569,443.965 r0 top (schematic designator C1)
XTX1_USB01_C2 "Cap Semi" C1210 89.569,443.965 r0 top (schematic designator C2)
XTX1_USB01_C3 "Cap Semi" C1210 89.569,443.965 r0 top (schematic designator C3)
XTX1_USB01_C4 "Cap Semi" 0402 89.569,443.965 r0 top (schematic designator C4)
XTX1_USB01_C5 "Cap Semi" 0402 89.569,443.965 r0 top (schematic designator C5)
XTX1_USB01_C6 "Cap Semi" 0402 89.569,443.965 r0 top (schematic designator C6)
XTX1_USB01_C7 "Cap Semi" 0402 89.569,443.965 r0 top (schematic designator C7)
XTX1_USB01_IC1 "Micrel MIC2026" "8-Pin SOIC" 89.569,443.965 r0 top (schematic designator IC1)
XTX1_USB01_L1 "Inductor" 0402-A 89.569,443.965 r0 top (schematic designator L1)
XTX1_USB01_L2 "Inductor" 0402-A 89.569,443.965 r0 top (schematic designator L2)
XTX1_USB01_L3 "Inductor" 0402-A 89.569,443.965 r0 top (schematic designator L3)
XTX1_USB01_L4 "Inductor" 0402-A 89.569,443.965 r0 top (schematic designator L4)
XTX1_USB01_TVS1 "SR05.TCT" SOT143 89.569,443.965 r0 top (schematic designator TVS1)
XTX1_USB01_TVS2 "SR05.TCT" SOT143 89.569,443.965 r0 top (schematic designator TVS2)
XTX1_USB23_C1 "Cap Semi" 0402 84.569,470.965 r0 top (schematic designator C1)
XTX1_USB23_C2 "Cap Semi" C1210 84.569,470.965 r0 top (schematic designator C2)
XTX1_USB23_C3 "Cap Semi" C1210 84.569,470.965 r0 top (schematic designator C3)
XTX1_USB23_C4 "Cap Semi" 0402 84.569,470.965 r0 top (schematic designator C4)
XTX1_USB23_C5 "Cap Semi" 0402 84.569,470.965 r0 top (schematic designator C5)
XTX1_USB23_C6 "Cap Semi" 0402 84.569,470.965 r0 top (schematic designator C6)
XTX1_USB23_C7 "Cap Semi" 0402 84.569,470.965 r0 top (schematic designator C7)
XTX1_USB23_IC1 "Micrel MIC2026" "8-Pin SOIC" 84.569,470.965 r0 top (schematic designator IC1)
XTX1_USB23_L1 "Inductor" 0402-A 84.569,470.965 r0 top (schematic designator L1)
XTX1_USB23_L2 "Inductor" 0402-A 84.569,470.965 r0 top (schematic designator L2)
XTX1_USB23_L3 "Inductor" 0402-A 84.569,470.965 r0 top (schematic designator L3)
XTX1_USB23_L4 "Inductor" 0402-A 84.569,470.965 r0 top (schematic designator L4)
XTX1_USB23_TVS1 "SR05.TCT" SOT143 84.569,470.965 r0 top (schematic designator TVS1)
XTX1_USB23_TVS2 "SR05.TCT" SOT143 84.569,470.965 r0 top (schematic designator TVS2)
XTX1_USB45_C1 "Cap Semi" 0402 84.569,458.965 r0 top (schematic designator C1)
XTX1_USB45_C2 "Cap Semi" C1210 84.569,458.965 r0 top (schematic designator C2)
XTX1_USB45_C3 "Cap Semi" C1210 84.569,458.965 r0 top (schematic designator C3)
XTX1_USB45_C4 "Cap Semi" 0402 84.569,458.965 r0 top (schematic designator C4)
XTX1_USB45_C5 "Cap Semi" 0402 84.569,458.965 r0 top (schematic designator C5)
XTX1_USB45_C6 "Cap Semi" 0402 84.569,458.965 r0 top (schematic designator C6)
XTX1_USB45_C7 "Cap Semi" 0402 84.569,458.965 r0 top (schematic designator C7)
XTX1_USB45_IC1 "Micrel MIC2026" "8-Pin SOIC" 84.569,458.965 r0 top (schematic designator IC1)
XTX1_USB45_L1 "Inductor" 0402-A 84.569,458.965 r0 top (schematic designator L1)
XTX1_USB45_L2 "Inductor" 0402-A 84.569,458.965 r0 top (schematic designator L2)
XTX1_USB45_L3 "Inductor" 0402-A 84.569,458.965 r0 top (schematic designator L3)
XTX1_USB45_L4 "Inductor" 0402-A 84.569,458.965 r0 top (schematic designator L4)
XTX1_USB45_TVS1 "SR05.TCT" SOT143 84.569,458.965 r0 top (schematic designator TVS1)
XTX1_USB45_TVS2 "SR05.TCT" SOT143 84.569,458.965 r0 top (schematic designator TVS2)
XTX1_VGA_C6_0 "3.3pF" "0805 (2012) Capacitor" 56.883,123.304 r180 bottom (schematic designator C6_0)
XTX1_VGA_C6_1 "3.3pF" "0805 (2012) Capacitor" 41.643,115.684 r180 bottom (schematic designator C6_1)
XTX1_VGA_C6_2 "3.3pF" "0805 (2012) Capacitor" 48.133,107.696 r180 bottom (schematic designator C6_2)
XTX1_VGA_C6_3 "3.3pF" "0805 (2012) Capacitor" 58.915,108.064 r180 bottom (schematic designator C6_3)
XTX1_VGA_C6_4 "3.3pF" "0805 (2012) Capacitor" 50.279,118.224 r180 bottom (schematic designator C6_4)
XTX1_VGA_C6_5 "3.3pF" "0805 (2012) Capacitor" 40.627,126.352 r180 bottom (schematic designator C6_5)
XTX1_VGA_C6_6 "10pF 50V" "0805 (2012) Capacitor" 53.327,125.844 r180 bottom (schematic designator C6_6)
XTX1_VGA_C6_7 "10pF 50V" "0805 (2012) Capacitor" 57.391,113.652 r180 bottom (schematic designator C6_7)
XTX1_VGA_D6_0 "SOT23" SOT23 43.675,121.78 r180 bottom (schematic designator D6_0)
XTX1_VGA_D6_1 "Dual Schottky Diode" SOT23 44.691,129.4 r180 bottom (schematic designator D6_1)
XTX1_VGA_D6_2 "Dual Schottky Diode" SOT23 57.899,120.256 r180 bottom (schematic designator D6_2)
XTX1_VGA_D6_3 "SOT23" SOT23 50.279,132.448 r180 bottom (schematic designator D6_3)
XTX1_VGA_D6_4 "Dual Schottky Diode" SOT23 42.103,134.128 r180 bottom (schematic designator D6_4)
XTX1_VGA_FB6_0 "200mA" "0805 (2012) Capacitor" 56.883,134.988 r180 bottom (schematic designator FB6_0)
XTX1_VGA_FB6_1 "200mA" "0805 (2012) Capacitor" 43.053,110.744 r180 bottom (schematic designator FB6_1)
XTX1_VGA_FB6_2 "200mA" "0805 (2012) Capacitor" 47.117,136.652 r180 bottom (schematic designator FB6_2)
XTX1_VGA_FB6_3 "200mA" "0805 (2012) Capacitor" 56.883,116.192 r180 bottom (schematic designator FB6_3)
XTX1_VGA_FB6_4 "200mA" "0805 (2012) Capacitor" 43.053,107.696 r180 bottom (schematic designator FB6_4)
XTX1_VGA_FB6_5 "200mA" "0805 (2012) Capacitor" 47.231,118.732 r180 bottom (schematic designator FB6_5)
XTX1_VGA_FB6_6 "200mA" "0805 (2012) Capacitor" 48.133,110.744 r180 bottom (schematic designator FB6_6)
XTX1_VGA_FB6_7 "200mA" "0805 (2012) Capacitor" 50.732,114.3 r180 bottom (schematic designator FB6_7)
XTX1_VGA_R6_0 "150_Ohm" "R 0805 (2012) RESISTOR" 65.011,116.7 r180 bottom (schematic designator R6_0)
XTX1_VGA_R6_1 "150Ohm 1%" "R 0805 (2012) RESISTOR" 53.327,122.288 r180 bottom (schematic designator R6_1)
XTX1_VGA_R6_2 "150Ohm 1%" "R 0805 (2012) RESISTOR" 54.229,108.204 r180 bottom (schematic designator R6_2)
XTX1_VGA_R6_3 "0Ohm" "R 1210 (3225) RESISTOR" 54.343,137.02 r180 bottom (schematic designator R6_3)
XTX1_VGA_VGA6_0 "DSub15" DSub15 48.027,41.288 r90 bottom (schematic designator VGA6_0)
XTX1_XTX "XTX_Board" XTX_Board -272.796,93.87 r180 top (schematic designator XTX)
XTX2_BATT1 "BH600" BH600 -388.112,145.796 r0 top (schematic designator BATT1)
XTX2_C16 "Cap Semi" C1210 -409.448,153.035 r90 top (schematic designator C16)
XTX2_D*1 "BAV99" SOT-23 -363.347,153.924 r90 top (schematic designator D*1)
XTX2_EthernetJack_C25 "Cap Semi" 0402 -135.598,89.09 r90 bottom (schematic designator C25)
XTX2_EthernetJack_C26 "Cap Semi" 0402 -136.014,86.09 r90 bottom (schematic designator C26)
XTX2_EthernetJack_Eth1 "48025-0002" 48025-0002 -146.066,84.216 r180 bottom (schematic designator Eth1)
XTX2_I2C "Header 4" HDR1X4 3.5,5.46 r90 top
XTX2_IL_SATA# "Header 3" HDR1X3 107.5,7.46 r90 top
XTX2_Interface_5V "LED2" C0805 -1.651,368.554 r90 top (schematic designator 5V)
"XTX2_Interface_Eth Act" "LED2" C0805 -124.079,368.554 r90 top (schematic designator "Eth Act")
"XTX2_Interface_Eth Lil" "LED2" C0805 -184.785,368.554 r90 top (schematic designator "Eth Lil")
"XTX2_Interface_Eth Spd" "LED2" C0805 -63.119,368.3 r90 top (schematic designator "Eth Spd")
XTX2_Interface_Power "FSM Switch" FSM4JH 27.051,365.633 r90 top (schematic designator Power)
XTX2_Interface_R14 "Res Semi" 1005[0402] -91.186,369.062 r90 top (schematic designator R14)
XTX2_Interface_R15 "Res Semi" 1005[0402] -152.146,369.062 r90 top (schematic designator R15)
XTX2_Interface_R16 "Res Semi" 1005[0402] -212.852,369.062 r90 top (schematic designator R16)
XTX2_Interface_R17 "Res Semi" 1005[0402] -270.002,369.062 r90 top (schematic designator R17)
XTX2_Interface_R18 "Res Semi" 1005[0402] -29.718,369.062 r90 top (schematic designator R18)
XTX2_Interface_Reset "FSM Switch" FSM4JH 58,366 r90 top (schematic designator Reset)
XTX2_Interface_SATA "LED2" C0805 -241.935,368.554 r90 top (schematic designator SATA)
XTX2_R8 "Res Semi" 1005[0402] -376.682,154.178 r90 top (schematic designator R8)
"XTX2_RS232 1" "Header 4" HDR1X4 62.5,5.46 r90 top
"XTX2_RS232 2" "Header 4" HDR1X4 16.5,5.46 r90 top
XTX2_SATA_C4_0 "10uF" "1210 (3225) Capacitor" -119.78,140.722 r90 top (schematic designator C4_0)
XTX2_SATA_C4_1 "10uF" "1210 (3225) Capacitor" -119.526,157.486 r90 top (schematic designator C4_1)
XTX2_SATA_C4_2 "10uF" "1210 (3225) Capacitor" -119.399,177.298 r90 top (schematic designator C4_2)
XTX2_SATA_SATA4_0 "SATA Drive" "SATA HDD" -57.984,13.408 r180 bottom (schematic designator SATA4_0)
XTX2_Serial_Drvs_C20 "Cap Semi" 0402 35.698,210.005 r90 top (schematic designator C20)
XTX2_Serial_Drvs_C21 "Cap Semi" 0402 67.956,210.005 r90 top (schematic designator C21)
XTX2_Serial_Drvs_C22 "Cap Semi" 0402 -28.818,210.005 r90 top (schematic designator C22)
XTX2_Serial_Drvs_C23 "Cap Semi" 0402 3.44,210.005 r90 top (schematic designator C23)
XTX2_Serial_Drvs_C24 "Cap Semi" 0402 -91.302,210.005 r90 top (schematic designator C24)
XTX2_Serial_Drvs_U1 "MAX232ACSE" NSO16_N -53.964,207.465 r90 top (schematic designator U1)
"XTX2_TTL Serial 1" "Header 4X2" HDR2X4 84.5,3.46 r90 top
"XTX2_TTL Serial 2" "Header 4X2" HDR2X4 38.5,3.46 r90 top
XTX2_USB1 "UX60-MB-5ST" UX60-MB-5ST 172.5,8.46 r90 top
XTX2_USB01_C1 "Cap Semi" 0402 -44.704,483.743 r90 top (schematic designator C1)
XTX2_USB01_C2 "Cap Semi" C1210 -109.474,482.6 r90 top (schematic designator C2)
XTX2_USB01_C3 "Cap Semi" C1210 -175.006,482.6 r90 top (schematic designator C3)
XTX2_USB01_C4 "Cap Semi" 0402 -285.242,483.743 r90 top (schematic designator C4)
XTX2_USB01_C5 "Cap Semi" 0402 -263.398,483.743 r90 top (schematic designator C5)
XTX2_USB01_C6 "Cap Semi" 0402 -241.554,483.743 r90 top (schematic designator C6)
XTX2_USB01_C7 "Cap Semi" 0402 -219.71,483.743 r90 top (schematic designator C7)
XTX2_USB01_IC1 "Micrel MIC2026" "8-Pin SOIC" -64.516,481.203 r90 top (schematic designator IC1)
XTX2_USB01_L1 "Inductor" 0402-A -88.773,483.997 r90 top (schematic designator L1)
XTX2_USB01_L2 "Inductor" 0402-A -132.461,483.997 r90 top (schematic designator L2)
XTX2_USB01_L3 "Inductor" 0402-A -154.305,483.997 r90 top (schematic designator L3)
XTX2_USB01_L4 "Inductor" 0402-A -197.993,483.997 r90 top (schematic designator L4)
XTX2_USB01_TVS1 "SR05.TCT" SOT143 -21.971,483.108 r90 top (schematic designator TVS1)
XTX2_USB01_TVS2 "SR05.TCT" SOT143 2.413,483.108 r90 top (schematic designator TVS2)
XTX2_USB2 "UX60-MB-5ST" UX60-MB-5ST 157.5,8.46 r90 top
XTX2_USB3 "UX60-MB-5ST" UX60-MB-5ST 142.5,8.46 r90 top
XTX2_USB4 "UX60-MB-5ST" UX60-MB-5ST 127.5,8.46 r90 top
XTX2_USB5 "UX60-MB-5ST" UX60-MB-5ST -108.519,-25.635 r0 top
XTX2_USB6 "UX60-MB-5ST" UX60-MB-5ST -141.158,-25.635 r0 top
XTX2_USB23_C1 "Cap Semi" 0402 5.33,263.861 r90 top (schematic designator C1)
XTX2_USB23_C2 "Cap Semi" C1210 -60.202,262.718 r90 top (schematic designator C2)
XTX2_USB23_C3 "Cap Semi" C1210 -126.496,262.718 r90 top (schematic designator C3)
XTX2_USB23_C4 "Cap Semi" 0402 -238.002,263.861 r90 top (schematic designator C4)
XTX2_USB23_C5 "Cap Semi" 0402 -215.904,263.861 r90 top (schematic designator C5)
XTX2_USB23_C6 "Cap Semi" 0402 -193.806,263.861 r90 top (schematic designator C6)
XTX2_USB23_C7 "Cap Semi" 0402 -171.708,263.861 r90 top (schematic designator C7)
XTX2_USB23_IC1 "Micrel MIC2026" "8-Pin SOIC" -14.736,261.321 r90 top (schematic designator IC1)
XTX2_USB23_L1 "Inductor" 0402-A -39.247,264.115 r90 top (schematic designator L1)
XTX2_USB23_L2 "Inductor" 0402-A -83.443,264.115 r90 top (schematic designator L2)
XTX2_USB23_L3 "Inductor" 0402-A -105.541,264.115 r90 top (schematic designator L3)
XTX2_USB23_L4 "Inductor" 0402-A -149.737,264.115 r90 top (schematic designator L4)
XTX2_USB23_TVS1 "SR05.TCT" SOT143 28.317,263.226 r90 top (schematic designator TVS1)
XTX2_USB23_TVS2 "SR05.TCT" SOT143 52.955,263.226 r90 top (schematic designator TVS2)
XTX2_USB45_C1 "Cap Semi" 0402 4.25,291.659 r90 top (schematic designator C1)
XTX2_USB45_C2 "Cap Semi" C1210 -61.282,290.516 r90 top (schematic designator C2)
XTX2_USB45_C3 "Cap Semi" C1210 -127.576,290.516 r90 top (schematic designator C3)
XTX2_USB45_C4 "Cap Semi" 0402 -239.082,291.659 r90 top (schematic designator C4)
XTX2_USB45_C5 "Cap Semi" 0402 -216.984,291.659 r90 top (schematic designator C5)
XTX2_USB45_C6 "Cap Semi" 0402 -194.886,291.659 r90 top (schematic designator C6)
XTX2_USB45_C7 "Cap Semi" 0402 -172.788,291.659 r90 top (schematic designator C7)
XTX2_USB45_IC1 "Micrel MIC2026" "8-Pin SOIC" -15.816,289.119 r90 top (schematic designator IC1)
XTX2_USB45_L1 "Inductor" 0402-A -40.327,291.913 r90 top (schematic designator L1)
XTX2_USB45_L2 "Inductor" 0402-A -84.523,291.913 r90 top (schematic designator L2)
XTX2_USB45_L3 "Inductor" 0402-A -106.621,291.913 r90 top (schematic designator L3)
XTX2_USB45_L4 "Inductor" 0402-A -150.817,291.913 r90 top (schematic designator L4)
XTX2_USB45_TVS1 "SR05.TCT" SOT143 27.237,291.024 r90 top (schematic designator TVS1)
XTX2_USB45_TVS2 "SR05.TCT" SOT143 51.875,291.024 r90 top (schematic designator TVS2)
XTX2_VGA_C6_0 "3.3pF" "0805 (2012) Capacitor" -304.015,41.642 r180 bottom (schematic designator C6_0)
XTX2_VGA_C6_1 "3.3pF" "0805 (2012) Capacitor" -311.889,58.914 r270 bottom (schematic designator C6_1)
XTX2_VGA_C6_2 "3.3pF" "0805 (2012) Capacitor" -315.699,34.53 r270 bottom (schematic designator C6_2)
XTX2_VGA_C6_3 "3.3pF" "0805 (2012) Capacitor" -312.143,54.401 r90 bottom (schematic designator C6_3)
XTX2_VGA_C6_4 "3.3pF" "0805 (2012) Capacitor" -304.777,58.914 r90 bottom (schematic designator C6_4)
XTX2_VGA_C6_5 "3.3pF" "0805 (2012) Capacitor" -308.079,49.321 r270 bottom (schematic designator C6_5)
XTX2_VGA_C6_6 "10pF 50V" "0805 (2012) Capacitor" -308.079,31.99 r90 bottom (schematic designator C6_6)
XTX2_VGA_C6_7 "10pF 50V" "0805 (2012) Capacitor" -311.654,34.326 r180 bottom (schematic designator C6_7)
XTX2_VGA_D6_0 "SOT23" SOT23 -312.143,42.15 r0 bottom (schematic designator D6_0)
XTX2_VGA_D6_1 "Dual Schottky Diode" SOT23 -303.507,66.534 r270 bottom (schematic designator D6_1)
XTX2_VGA_D6_2 "Dual Schottky Diode" SOT23 -308.587,54.342 r0 bottom (schematic designator D6_2)
XTX2_VGA_D6_3 "SOT23" SOT23 -312.143,38.594 r0 bottom (schematic designator D6_3)
XTX2_VGA_D6_4 "Dual Schottky Diode" SOT23 -312.143,45.706 r0 bottom (schematic designator D6_4)
XTX2_VGA_FB6_0 "200mA" "0805 (2012) Capacitor" -304.142,44.69 r180 bottom (schematic designator FB6_0)
XTX2_VGA_FB6_1 "200mA" "0805 (2012) Capacitor" -301.983,58.914 r270 bottom (schematic designator FB6_1)
XTX2_VGA_FB6_2 "200mA" "0805 (2012) Capacitor" -308.079,58.914 r90 bottom (schematic designator FB6_2)
XTX2_VGA_FB6_3 "200mA" "0805 (2012) Capacitor" -307.825,64.053 r270 bottom (schematic designator FB6_3)
XTX2_VGA_FB6_4 "200mA" "0805 (2012) Capacitor" -311.889,63.994 r270 bottom (schematic designator FB6_4)
XTX2_VGA_FB6_5 "200mA" "0805 (2012) Capacitor" -308.079,37.07 r270 bottom (schematic designator FB6_5)
XTX2_VGA_FB6_6 "200mA" "0805 (2012) Capacitor" -307.542,44.246 r90 bottom (schematic designator FB6_6)
XTX2_VGA_FB6_7 "200mA" "0805 (2012) Capacitor" -304.178,36.69 r180 bottom (schematic designator FB6_7)
XTX2_VGA_R6_0 "150_Ohm" "R 0805 (2012) RESISTOR" -301.983,48.754 r270 bottom (schematic designator R6_0)
XTX2_VGA_R6_1 "150Ohm 1%" "R 0805 (2012) RESISTOR" -303.448,62.978 r0 bottom (schematic designator R6_1)
XTX2_VGA_R6_2 "150Ohm 1%" "R 0805 (2012) RESISTOR" -305.031,53.834 r90 bottom (schematic designator R6_2)
XTX2_VGA_R6_3 "0Ohm" "R 1210 (3225) RESISTOR" -312.67,29.99 r180 bottom (schematic designator R6_3)
XTX2_VGA_VGA6_0 "DSub15" DSub15 -278.466,48.694 r270 bottom (schematic designator VGA6_0)
XTX2_XTX "XTX_Board" XTX_Board -19.474,1.876 r0 top (schematic designator XTX)

## Footprints (in the part's own frame and the unit in brackets; to place one, negate y for a bottom-side part, rotate by r counter-clockwise, add the part's x,y. Pads: shape width x height; smd on the part's side, far side on the other; paste and mask are expansions set on the pad)
"8-Pin SOIC" [mm] "SOIC, 8-Leads, Body 6.0x4.0mm (max), Pitch 1.27mm, IPC Medium Density"
  oval 2.2x0.6 smd: 1(-2.4,1.905) 2(-2.4,0.635) 3(-2.4,-0.635) 4(-2.4,-1.905) 5(2.4,-1.905) 6(2.4,-0.635) 7(2.4,0.635) 8(2.4,1.905)
  silkscreen extent -2.79,-3 1.91,3, body extent -1.99,-2.99 1.99,2.99, height 1.73
"8-POS 5569 Mini-Fit Jr 2" [mm] "Right Angle w/ Press-Fit Pegs"
  round 3 hole 1.8: 1(0,0) 2(4.2,0) 3(8.4,0) 4(12.6,0) 5(0,5.5) 6(4.2,5.5) 7(8.4,5.5) 8(12.6,5.5)
  round 0 hole 3 unplated: ""(0,-7.3) ""(12.6,-7.3)
  silkscreen extent -2.82,-14.1 15.9,7.25, body extent -2.65,-13.95 15.75,5.99, height 11.4
"10-Pos 5569 Mini-Fit Jr 2" [mm] "Right Angle w/ Press-Fit Pegs"
  round 3 hole 1.8: 1(0,0) 2(4.2,0) 3(8.4,0) 4(12.6,0) 5(16.8,0) 6(0,5.5) 7(4.2,5.5) 8(8.4,5.5) 9(12.6,5.5) 10(16.8,5.5)
  round 0 hole 3 unplated: ""(0,-7.3) ""(16.8,-7.3)
  silkscreen extent -3,-14 20.2,7.5, body extent -2.7,-13.87 19.9,6.07, height 11.4
0402 [mm] "Chip Capacitor; Body 1.0 x 0.5 mm (LxW typ)"
  rect 0.9x0.7 smd: 1(-0.65,0) 2(0.65,0)
  silkscreen extent -1.4,-0.25 -1.4,0.25
0402-A [mm] "Chip Inductor; Body 1 x 0.5 mm (LxW typ)"
  rect 0.6x0.5 smd: 1(-0.5,0) 2(0.5,0)
  silkscreen extent -1.1,-0.15 -1.1,0.15
"0805 (2012) Capacitor" [mm] "0805 (2012) Capacitor"
  rect 0.85x1.4 smd: 1(-1.075,0) 2(1.075,0)
  silkscreen extent -1.78,-0.95 1.77,0.95, body extent -1.19,-0.65 1.19,0.65, height 0.85
1005[0402] [mm] "Chip Resistor; Body 1.1 x 0.5 mm (LxW typ)"
  rect 0.9x0.7 smd: 1(-0.65,0) 2(0.65,0)
"1210 (3225) Capacitor" [mm] "1210 (3225) Capacitor"
  rect 0.95x2.8 smd: 1(-1.725,0) 2(1.725,0)
  silkscreen extent -2.45,-1.62 2.45,1.65, body extent -1.83,-1.43 1.83,1.43, height 1.81
48025-0002 [mm] "Modular RJ45 Jack w/ Magnetics & LEDs"
  round 1.5 hole 0.89: 1(-4.445,0) 2(-3.175,2.54) 3(-1.905,0) 4(-0.635,2.54) 5(0.635,0) 6(1.905,2.54) 7(3.175,0) 8(4.445,2.54)
  round 1.7 hole 1.02: 9(-5.461,7.366) 10(-2.921,7.366) 11(2.921,7.366) 12(5.461,7.366)
  round 0 hole 1.63 unplated: ""(-7.874,-3.302) ""(7.874,-3.302)
  round 0 hole 3.18 unplated: ""(-5.715,-6.35) ""(5.715,-6.35)
  silkscreen extent -9,-16.37 9,9, body extent -9.13,-16.5 9.13,9.13, height 14.9
BH600 [mil] "16mm Battery Holder"
  round 75 hole 42: +(-1,-425) -(-1,231)
  silkscreen extent -375,-545 375,375, body extent -375,-545 375,375, height 330
C0805 [mm] "Chip Capacitor; Body 2.0 x 1.2 mm (LxW typ)"
  rect 1.3x1.5 smd: 1(-0.95,0) 2(0.95,0)
  silkscreen extent -1.9,-0.65 -1.9,0.65
C1210 [mm] "Chip Capacitor; Body 3.2 x 2.5 mm (LxW typ)"
  rect 1.6x2.7 smd: 1(-1.4,0) 2(1.4,0)
  silkscreen extent -0.3,-1.25 0.3,1.25
DSub15 [mil] "3 Row 15 Pin Female Right Angle Connector Tyco PN 1734344"
  round 65 hole 46.85: 1(-172.44,-100) 2(-82.28,-100) 3(7.87,-100) 4(98.03,-100) 5(188.19,-100) 6(-217.32,0) 7(-127.17,0) 8(-37.01,0) 9(53.15,0) 10(143.31,0) 11(-172.44,100) 12(-82.28,100) 13(7.87,100) 14(98.03,100) 15(188.19,100)
  round 147 hole 126.77: CGND(-494.49,0) CGND(494.49,0)
  silkscreen extent -606,-177 606,811, body extent -606,-177 606,689, height 502
FSM4JH [mm]
  round 1.5 hole 0.99: 1(-3.75,-2.25) 2(3.75,-2.25) 3(-3.75,2.25) 4(3.75,2.25)
  silkscreen extent -3,-3 3,3, body extent -3.13,-3.13 3.13,3.13, height 5
HDR1X3 [mm] "Connector; Header; 3 Position"
  rect 1.5x1.5 hole 0.9: 1(0,0)
  round 1.5 hole 0.9: 2(2.54,0) 3(5.08,0)
  silkscreen extent -1.27,-1.27 6.35,1.27
HDR1X4 [mm] "Connector; Header; 4 Position"
  rect 1.5x1.5 hole 0.9: 1(0,0)
  round 1.5 hole 0.9: 2(2.54,0) 3(5.08,0) 4(7.62,0)
  silkscreen extent -1.27,-1.27 8.89,1.27
HDR2X4 [mm] "Connector; Header; 4x2 Position"
  rect 1.5x1.5 hole 0.9: 1(0,0)
  round 1.5 hole 0.9: 2(0,2.54) 3(2.54,0) 4(2.54,2.54) 5(5.08,0) 6(5.08,2.54) 7(7.62,0) 8(7.62,2.54)
  silkscreen extent -1.27,-1.27 8.89,3.81
NSO16_N [mm] "16-Pin Small Outline Integrated Circuit 1.27 mm Pitch, IPC Medium Density"
  oval 2.2x0.6 smd: 1(-2.4,4.445) 2(-2.4,3.175) 3(-2.4,1.905) 4(-2.4,0.635) 5(-2.4,-0.635) 6(-2.4,-1.905) 7(-2.4,-3.175) 8(-2.4,-4.445) 9(2.4,-4.445) 10(2.4,-3.175) 11(2.4,-1.905) 12(2.4,-0.635) 13(2.4,0.635) 14(2.4,1.905) 15(2.4,3.175) 16(2.4,4.445)
  silkscreen extent -2.52,-5 0.9,5.42, body extent -1.95,-4.95 1.95,4.95, height 1.75